# Altium PCB 宁波2号线PIS_数字功率放大器_功放板(BHC-A-2030-01)_PCB(06001536)_V1.0.PcbDoc (part 1 of 3)
Units mm, origin at the board's own origin, x right, y up, seen from the top; angles counter-clockwise.
Board outline 162 x 100 mm, 2 copper layers (Top Layer, Bottom Layer); 141 components, 101 nets, 408 pads, 79 vias.
Unrouted connection lines stored in the file: 2.
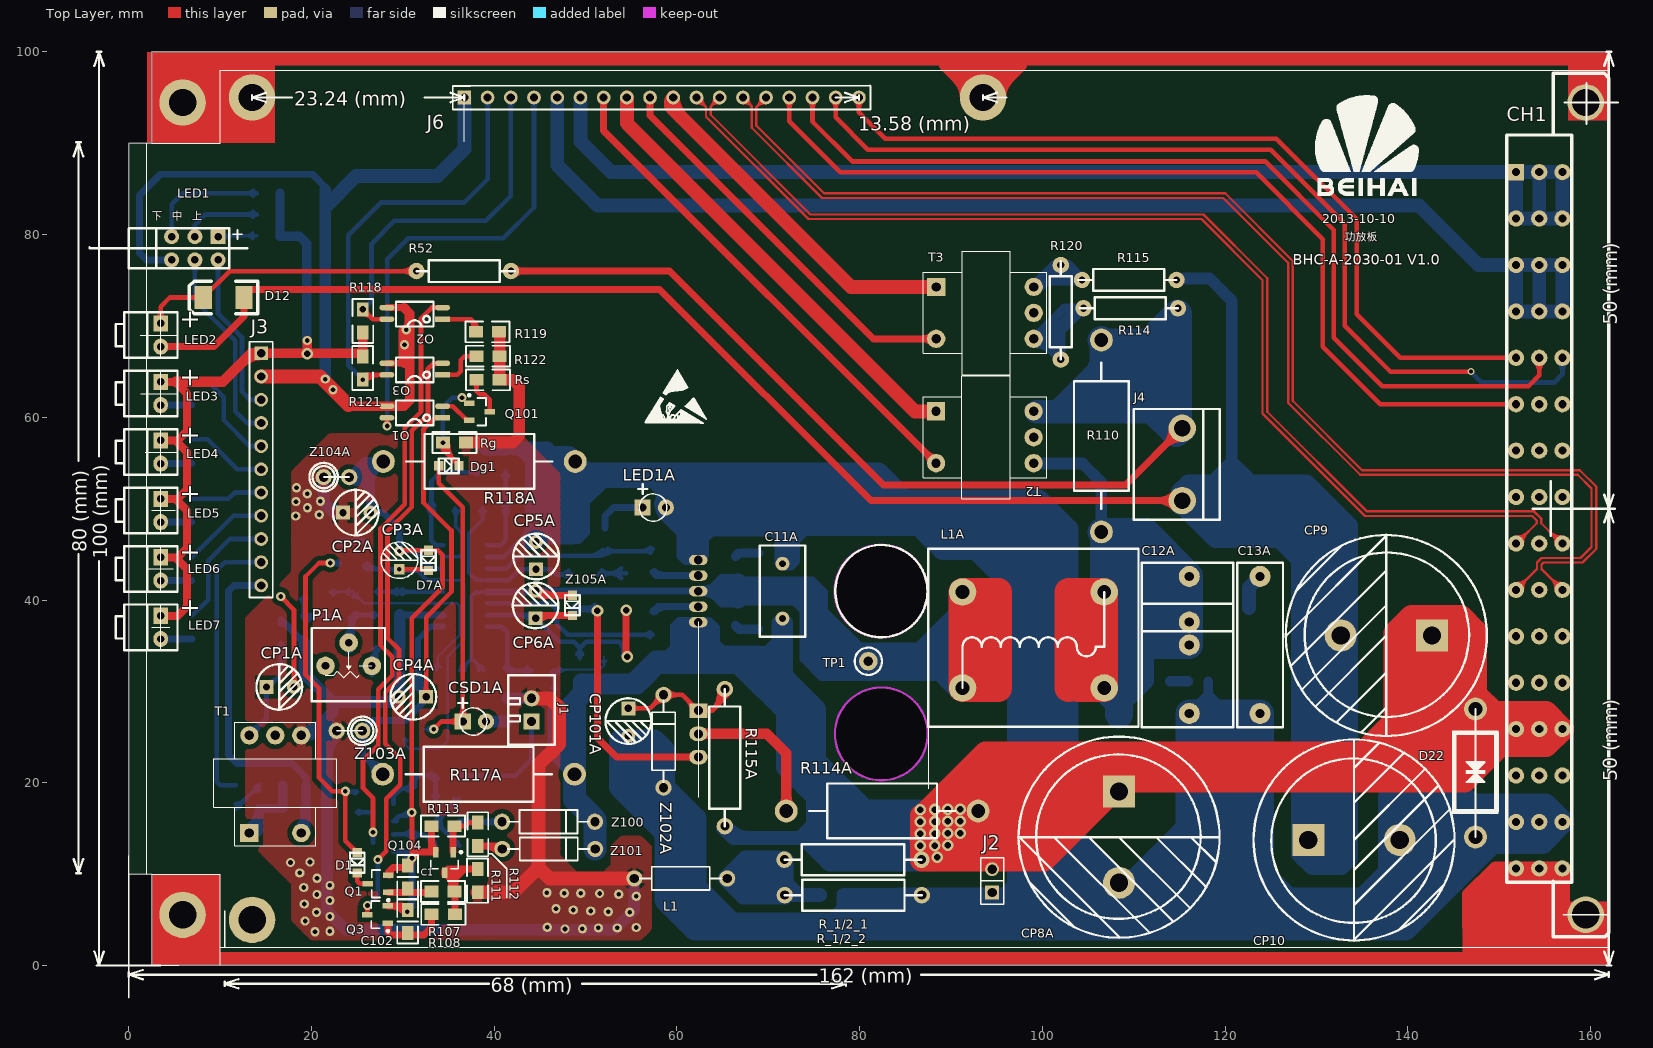
[diagram p0: Top Layer view]
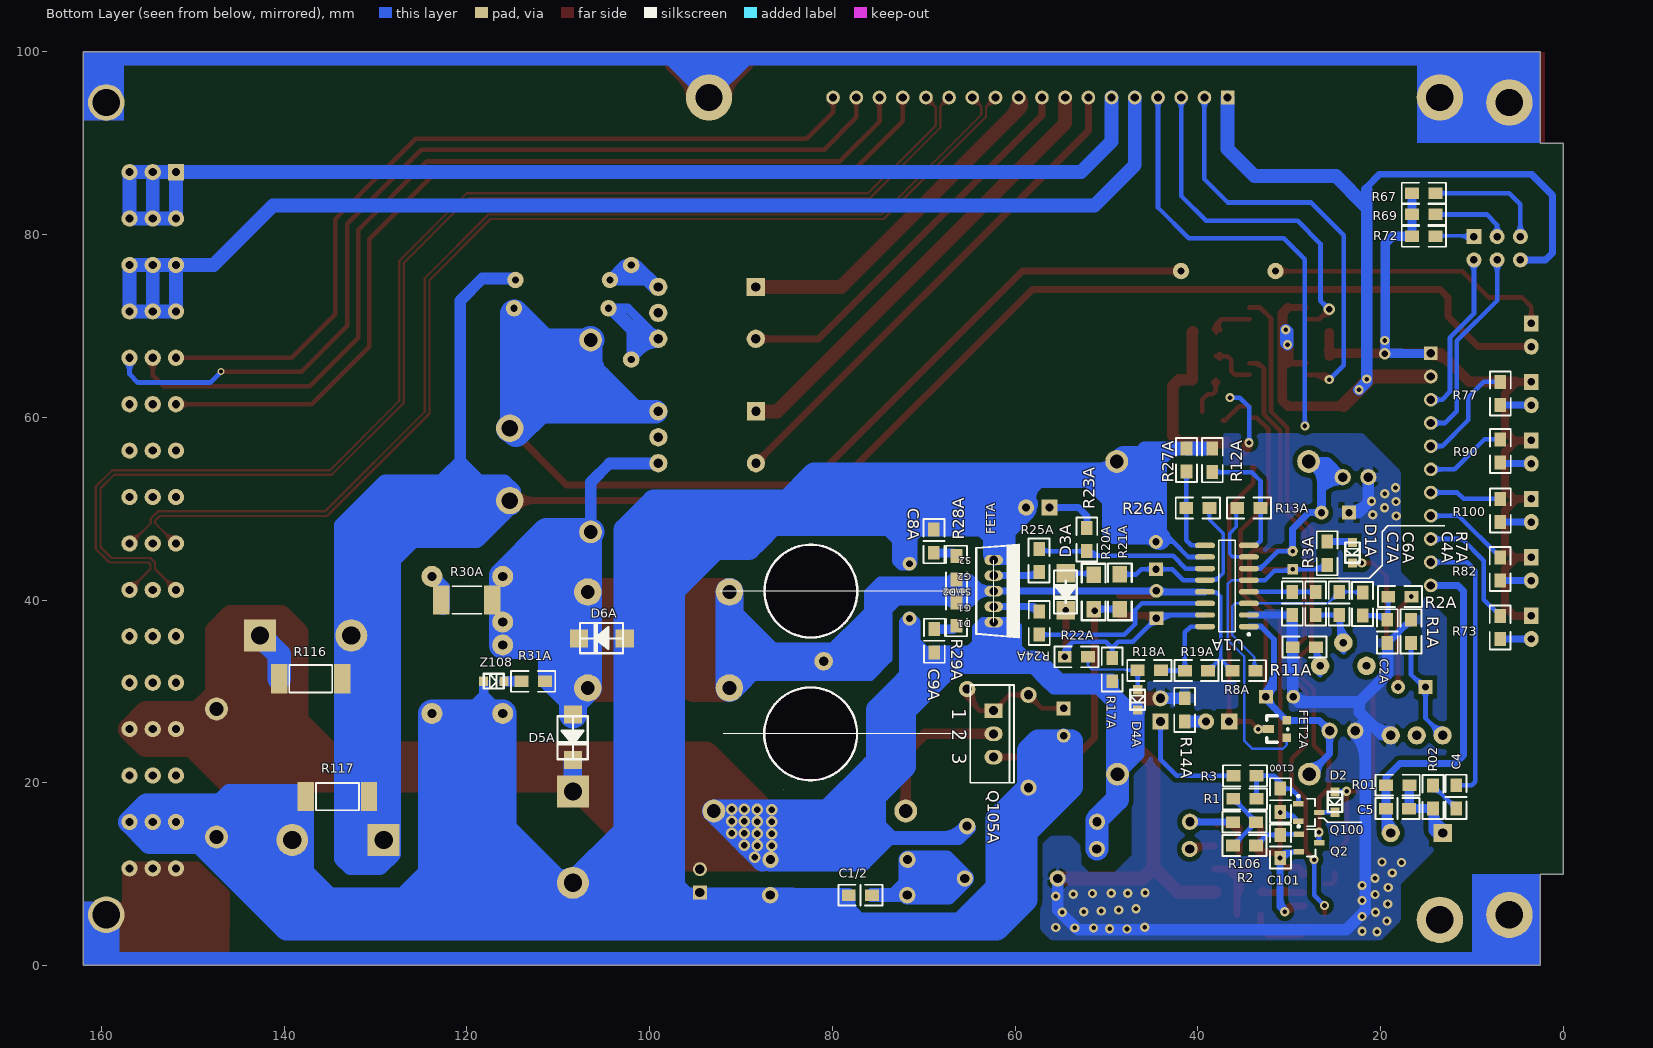
[diagram p1: Bottom Layer view, seen from below]
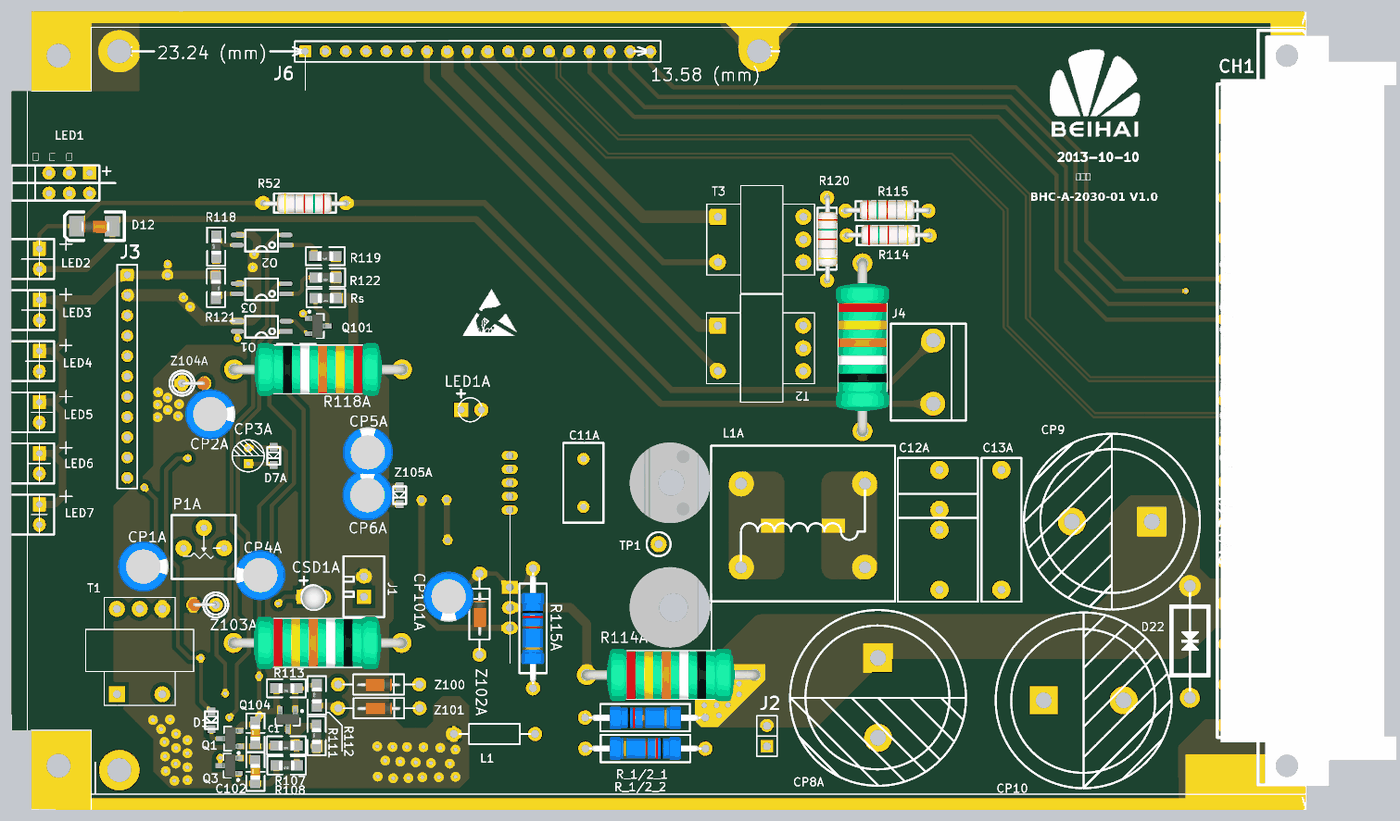
[diagram p4: 3D render of the assembled board from above, using the file's embedded part models]

## Layer stack, top to bottom
Top Layer: signal copper 0.0356
Dielectric: dielectric 0.32, FR-4, Dk 4.8
Bottom Layer: signal copper 0.0356

## Board outline
0,10 0,90 2.5,90 2.5,100 162,100 162,0 2.5,0 2.5,10
cut-out: 77.334,40.977 ccw(c82.381,40.977) 82.381,35.93 ccw(c82.381,40.977) 87.428,40.977 ccw(c82.381,40.977) 82.381,46.024 ccw(c82.381,40.977)
cut-out: 77.323,25.38 ccw(c82.37,25.38) 82.37,20.333 ccw(c82.37,25.38) 87.417,25.38 ccw(c82.37,25.38) 82.37,30.427 ccw(c82.37,25.38)

## Design rules (kind name [scope] priority, off if disabled: settings)
Clearance [All] p1: gap=0.254
ComponentClearance [All] p1: gap=0 collisioncheckmode=3 verticalgap=0 showdistances=FALSE
DiffPairsRouting [All] p1: maxlimit=0.254 minlimit=0.254 mostfreqgap=0.254 maxuncoupledlength=12.7
Height [All] p1: minheight=0 maxheight=31 prefheight=12.7
HoleSize [All] p1: absolutevalues=TRUE maxlimit=12.7 minlimit=0.025 maxpercent=80.000 minpercent=20.000
MinimumSolderMaskSliver [All] p1: minsoldermaskwidth=0
PlaneConnect [All] p1: planeconnectstyle=Relief reliefexpansion=0.508 reliefentries=4 reliefconductorwidth=1.016 reliefairgap=0.508
PolygonConnect [All] p1: connectstyle=Relief reliefconductorwidth=1.016 reliefentries=4 polygonreliefangle="90 Angle" airgapwidth=0.381
RoutingVias [All] p1: holewidth=0.711 width=1.27 viastyle="Through Hole" minholewidth=0.381 minwidth=0.762 maxholewidth=0.711 maxwidth=1.27
SilkToSilkClearance [All] p1: silktosilkclearance=0
SilkToSolderMaskClearance [IsPad] p1: minsilkscreentomaskgap=0 clearancetoexposedcopper=TRUE
SolderMaskExpansion [All] p1: expansion=0.102
Width [All] p1: maxlimit=5.08 minlimit=0.203 preferedwidth=0.254 minimp=50.000000 maximp=50.000000 favimp=50.000000
20 further rules are at their usual default settings.

## Classes and differential pairs
net class NET[0..3]: NET0 NET1 NET2 NET3
component class "U_Digital Amplifier": C1 C1/2 C2A C4 C4A C5 C6A C7A C8A C9A C11A C12A C13A C100 C101 C102 CP1A CP2A CP3A CP4A CP5A CP6A CP8A CP9 CP10 CP101A CSD1A D1 D1A D2 D3A D4A D5A D6A D7A Dg1 FET2A FETA J1 L1 L1A LED1A O1 P1A Q1 Q2 Q3 Q100 Q101 Q104 Q105A R1 R01 R1A R02 R2 R2A R3 R3A R7A R8A R11A R12A R13A R14A R17A R18A R19A R20A R21A R22A R23A R24A R25A R26A R27A R28A R29A R30A R31A R106 R107 R108 R111 R112 R113 R114A R115A R116 R117 R117A R118A R_1/2_1 R_1/2_2 Rg Rs T1 TP1 U1A Z100 Z101 Z102A Z103A Z104A Z105A Z108
component class 宁波2号线PIS-数字功率放大器（BHB-2430-01）-原理图-V0.1: CH1 D12 D22 J2 J3 J4 J6 LED1 LED2 LED3 LED4 LED5 LED6 LED7 O2 O3 R52 R67 R69 R72 R73 R77 R82 R90 R100 R110 R114 R115 R118 R119 R120 R121 R122 T2 T3
differential pair MB_TX: +MB_TX_P -MB_TX_N
differential pair MB_RX: +MB_RX_P -MB_RX_N

## Components (designator, comment, footprint, x,y, rotation, side; value= is the part's Value field where it differs from the comment)
C1 "" c0805 30.531,9.677 r270 top
C1/2 "Cap" C0805 76.922,7.696 r180 bottom
C2A "" c0805 19.264,36.583 r90 bottom
C4 "Cap" c0805 11.731,18.447 r270 bottom
C4A "" c0805 24.529,39.611 r270 bottom
C5 "Cap" c0805 18.132,17.177 r180 bottom
C6A "" c0805 27.104,39.636 r90 bottom
C7A "" c0805 29.654,39.636 r90 bottom
C8A "" c0805 68.885,46.431 r270 bottom
C9A "" c0805 68.834,35.535 r270 bottom
C11A "" MKP-0.1-160V 71.552,40.97 r270 top
C12A "" MKP-7.5-10-15-400V 116.078,27.584 r90 top
C13A "" MKP-15-100V 123.825,27.584 r90 top
C100 "" c0805 30.959,18.092 r90 bottom
C101 "" c0805 30.963,13.03 r90 bottom
C102 "" c0805 30.531,4.801 r270 top
CH1 "OPIN-48" OPIN-48F 162,50 r0 top locked
CP1A "" C5*10 15.084,30.487 r0 top
CP2A "" C5*10 23.455,49.562 r0 top
CP3A "" E10 29.627,44.355 r90 top
CP4A "" C5*10 32.554,29.411 r180 top
CP5A "" C5*10 44.588,43.364 r90 top
CP6A "" C5*10 44.537,38.005 r90 top
CP8A "" CD-22*30 108.393,14.046 r270 top
CP9 "" CD-22*30 137.643,36.119 r180 top
CP10 "" CD-22*30 134.112,13.741 r0 top
CP101A "" C5*10 54.682,28.15 r270 top
CSD1A "RED" LED-3 37.842,26.702 r0 top
D1 "" SOD-323 25.015,12.351 r270 top
D1A "" SOD-323 23.079,46.286 r270 bottom
D2 "" SOD-323 24.99,19.006 r270 bottom
D3A "DIODE" MURA120T3G#1 54.443,42.933 r270 bottom
D4A "DIODE" SOD-323 46.579,30.186 r270 bottom
D5A "DIODE" MURA120T3G#2 108.382,27.483 r270 bottom
D6A "DIODE" MURA120T3G#2 102.718,35.789 r0 bottom
D7A "DIODE" SOD-323 32.813,45.447 r270 top
D12 "DIODE" 7227AK 10.4,73.1 r180 top
D22 "D_TVS" TVS-CA 147.396,28.067 r270 top
Dg1 "" SOD-323 33.931,54.693 r0 top
FET2A "BS250F" STO23 30.375,24.823 r90 bottom
FETA "IRFI4020" MOS_diy 62.328,40.977 r270 bottom locked
J1 "Jump" CH2.54-2 44.091,26.702 r90 top
J2 "CON2" SIP2.54-2 94.5,8 r90 top
J3 "CON11" SIP2.54-11 14.5,67 r90 top
J4 "CON2" CH3.96-3P+ 115.3,58.8 r270 top
J6 "CON18" SIP2.54-18 36.74,95 r0 top locked
L1 "磁珠" L-AXIAL0.4 55.343,9.532 r0 top
L1A "Inductor Iron" 7G23A 91.262,30.378 r90 top
LED1 "LED" LED-3-3-L 3,78.5 r0 top
LED1A "Blue" LED-3 57.516,50.121 r0 top
LED2 "RED" LED-3-L 3.5,69 r90 top
LED3 "" LED-3-L 3.5,62.6 r90 top
LED4 "" LED-3-L 3.5,56.2 r90 top
LED5 "" LED-3-L 3.5,49.8 r90 top
LED6 "" LED-3-L 3.5,43.4 r90 top
LED7 "" LED-3-L 3.5,37 r90 top
O1 "TLP281" SOP4 34.352,59.944 r180 top
O2 "TLP281" SOP4 34.352,70.739 r180 top
O3 "TLP281" SOP4 34.352,64.643 r180 top
P1A "Pot" 3362/3323 21.504,31.761 r0 top locked
Q1 "MMBT5551" SOT-23B_N 27.301,8.948 r180 top
Q2 "MMBT5551" SOT-23B_N 27.835,13.418 r180 bottom
Q3 "MMBT5551" SOT-23B_N 27.25,5.569 r180 top
Q100 "MMBT5551" SOT-23B_N 27.86,16.745 r180 bottom
Q101 "MMBT5401" SOT-23B_N 38.39,60.605 r0 top
Q104 "MMBT5551" SOT-23B_N 34.566,11.284 r270 top
Q105A "TIP31F" TO-220-AB-W 62.352,25.349 r270 bottom locked
R1 "" M0805 34.845,18.219 r0 bottom
R01 "" M0805 18.132,19.743 r180 bottom
R1A "" M0805 16.659,36.583 r270 bottom
R2 "" M0805 34.896,13.139 r180 bottom
R02 "" M0805 14.271,18.422 r90 bottom
R2A "" M0805 17.878,40.367 r0 bottom
R3 "" M0805 34.82,20.759 r0 bottom
R3A "" M0805 25.854,45.111 r90 bottom
R7A "" M0805 21.979,39.561 r90 bottom
R8A "" M0805 34.929,32.261 r0 bottom
R11A "" M0805 28.329,34.836 r0 bottom
R12A "" M0805 38.404,55.311 r270 bottom
R13A "" M0805 34.404,50.061 r0 bottom
R14A "" M0805 41.449,27.972 r90 bottom
R17A "" M0805 49.363,32.392 r270 bottom
R18A "" M0805 45.304,32.286 r0 bottom
R19A "" M0805 40.154,32.286 r180 bottom
R20A "" M1206 51.395,40.875 r270 bottom
R21A "" M1206 48.525,40.901 r270 bottom
R22A "" M0805 53.3,33.789 r180 bottom
R23A "" M0805 52.157,46.616 r90 bottom
R24A "res" M0805 57.364,37.472 r90 bottom
R25A "" M0805 57.364,44.33 r270 bottom
R26A "Res3" M0805 40.004,50.086 r180 bottom
R27A "" M0805 41.229,55.336 r270 bottom
R28A "" M0805 66.404,43.542 r270 bottom
R29A "" M0805 66.404,38.462 r270 bottom
R30A "" M2512R 120,40 r180 bottom
R31A "" M0805 112.751,31.115 r180 bottom
R52 "" R-1/4W 31.5,76 r0 top
R67 "" M0805 15.262,84.515 r0 bottom
R69 "" M0805 15.26,82.191 r0 bottom
R72 "" M0805 15.262,79.791 r0 bottom
R73 "11k" M0805 6.9,37 r270 bottom
R77 "11k" M0805 6.9,62.6 r90 bottom
R82 "11k" M0805 6.9,43.4 r270 bottom
R90 "11k" M0805 6.9,56.3 r90 bottom
R100 "11k" M0805 6.9,49.8 r90 bottom
R106 "" M0805 34.896,15.704 r180 bottom
R107 "" M0805 34.413,8.084 r180 top
R108 "" M0805 34.439,5.595 r180 top
R110 "" R-2W 106.451,68.453 r270 top
R111 "" M0805 38.172,9.278 r90 top
R112 "" M0805 38.198,14.358 r90 top
R113 "" M0805 34.413,15.247 r180 top
R114 "" R-1/4W 114.833,71.933 r180 top
R114A "" R-2W 71.969,16.917 r0 top
R115 "" R-1/4W 114.681,75.032 r180 top
R115A "" R-1W 65.248,30.251 r270 top
R116 "" 1T-2512 137.084,31.394 r0 bottom
R117 "" 1T-2512 134.163,18.491 r180 bottom
R117A "" R-2W 27.798,20.936 r0 top
R118 "" M0805 25.614,70.536 r90 top
R118A "" R-2W 48.87,55.169 r180 top
R119 "" M0805 39.279,69.342 r180 top
R120 "" R-1/4W 102.017,66.32 r90 top
R121 "" M0805 25.614,65.405 r270 top
R122 "" M0805 39.33,66.675 r180 top
R_1/2_1 "" R-1W 71.766,11.583 r0 top
R_1/2_2 "" R-1W 86.803,7.696 r180 top
Rg "Res3" M0805 35.658,57.233 r180 top
Rs "Res3" M0805 39.33,64.084 r180 top
T1 "EE13" EE13-C 13.204,14.51 r90 top
T2 "EE13" EE13-c 88.367,60.655 r0 top
T3 "EE13" EE13-C 88.377,74.27 r0 top
TP1 "TP" TP 80.95,33.299 r90 top
U1A "" SOIC16_N 36.813,41.536 r0 bottom locked
Z100 "75V 1N4761" AXIAL0.4AK 40.865,15.729 r0 top
Z101 "36V 1N4753" AXIAL0.4AK 40.89,12.758 r0 top
Z102A "12V" AXIAL0.4AK 58.543,19.463 r90 top
Z103A "5.6V" AXIAL0.4AK-V 22.769,25.686 r0 top
Z104A "5.6V" AXIAL0.4AK-V 24.141,53.448 r180 top
Z105A "12V" SOD-323 48.561,40.52 r270 top
Z108 "12V" SOD-323 118.161,31.115 r180 bottom

## Footprints (in the part's own frame and the unit in brackets; to place one, negate y for a bottom-side part, rotate by r counter-clockwise, add the part's x,y. Pads: shape width x height; smd on the part's side, far side on the other; paste and mask are expansions set on the pad)
1T-2512 [mm] "Chip Resistor; Body 6.4 x 3.2 mm (LxW typ)"
  rect 1.8x3.2 smd: 1(-3.45,0) 2(3.45,0)
  silkscreen extent -2.35,-1.5 2.35,1.5, body extent -3.66,-1.5 3.66,1.5, height 1
7G23A [mm] "数字功放电感 22uH/15uH/10uH"
  round 3 hole 1.5: 1(0,0) 1(10.5,0) 2(0,-15.5) 2(10.5,-15.5)
  silkscreen extent -4.25,-19.25 15.25,3.75, body extent -4.25,-19.25 15.25,3.75, height 23
3362/3323 [mil]
  round 80 hole 33: 1(1.23,40.6) 2(101.23,140.6) 3(201.23,40.6)
  silkscreen extent -57,-111 257,204, body extent -57,-111 257,204, height 203
7227AK [mm]
  rect 1.905x2.54 smd: A(-2.216,-0.013) K(2.229,-0.013)
  silkscreen extent -3.74,-1.79 3.75,1.77, body extent -1.85,-0.7 1.65,0.8, height 1.45
AXIAL0.4AK [mil] "直插稳压管"
  round 70 hole 40: 1(0,0) 2(400,0)
  silkscreen extent 25,-50 375,50, body extent 92,-34 308,31, height 111
AXIAL0.4AK-V [mil]
  round 70 hole 40: 1(0,0) 2(110.24,0)
  silkscreen extent 0,-61 172,61, body extent -27,-31 114,33, height 217
C5*10 [mil]
  rect 60x60 hole 31.5: 1(0,0)
  round 60 hole 31.5: 2(118.11,0)
  silkscreen extent -43,-98 154,98, body extent -68,-124 180,124, height 433
c0805 [mil]
  rect 60x50 smd: 1(-50.36,-0.05) 2(49.64,-0.05)
  silkscreen extent -95,-45 95,45, body extent -39,-25 39,25, height 31
C0805 [mil]
  rect 60x50 smd: 1(-50.36,-0.05) 2(49.64,-0.05)
  silkscreen extent -95,-45 95,45, body extent -39,-25 39,25, height 31
CD-22*30 [mm] "160V 470uF 3000h"
  rect 3.5x3.5 hole 2: 1(-5,0)
  round 3.5 hole 2: 2(5,0)
  silkscreen extent -11,-11.02 11,11, body extent -11.01,-11.02 11.01,11.01, height 30.1
CH2.54-2 [mil]
  rect 70x70 hole 40: 1(0,0)
  round 70 hole 40: 2(100,0)
  silkscreen extent -100,-100 200,100, body extent -100,-100 200,100, height 276
CH3.96-3P+ [mm]
  round 3 hole 1.8: 1(0,0) 2(7.92,0)
  silkscreen extent -2.1,-5.3 10.02,4.1, body extent -2.1,-5.3 10.02,4.1, height 14.6
E10 [mil]
  rect 45x45 hole 20: 1(-39.37,0)
  round 45 hole 20: 2(39.37,0)
  silkscreen extent -79,-79 79,79, body extent -102,-99 96,100, height 446
EE13-C [mm]
  rect 2x2 hole 1.016: 1(0,0)
  round 2 hole 1.016: 2(0,-5.68) 3(10.68,0) 4(10.68,-2.84) 5(10.68,-5.68)
  silkscreen extent -1.41,-9.59 12.09,3.91, body extent -1.41,-9.59 12.09,3.91, height 9.35
EE13-c [mm]
  rect 2x2 hole 1.016: 1(0,0)
  round 2 hole 1.016: 2(0,-5.68) 3(10.68,0) 4(10.68,-2.84) 5(10.68,-5.68)
  silkscreen extent -1.41,-9.59 12.09,3.91, body extent -1.41,-9.59 12.09,3.91, height 9.35
L-AXIAL0.4 [mil] "磁珠"
  round 70 hole 40: 1(0,0) 2(400,0)
  silkscreen extent 25,-50 375,50, body extent 82,-79 318,78, height 157
LED-3 [mil]
  rect 70x70 hole 35: 1(-50,0)
  round 70 hole 35: 2(50,0)
  silkscreen extent -70,-59 54,100, body extent -66,-70 64,59, height 217
LED-3-3-L [mil]
  rect 65x65 hole 32: 1(266.89,50)
  round 65 hole 32: 2(266.89,-50) 3(166.89,50) 4(166.89,-50) 5(66.89,50) 6(66.89,-50)
  silkscreen extent -118,-87 371,87
LED-3-L [mil] "带座"
  rect 70x62 hole 32: 1(50,0)
  oval 70x62 hole 32: 2(-50,0)
  silkscreen extent -98,-73 98,193, body extent -103,-78 103,193, height 276
M0805 [mil]
  rect 60x50 smd: 1(-49.68,-0.37) 2(50.32,-0.37)
  silkscreen extent -95,-45 95,45, body extent -39,-25 39,25, height 31
M1206 [mm]
  rect 1.8x1.6 smd: 1(-1.9,0) 2(1.9,0)
  silkscreen extent -3.1,-1.3 3.1,1.3
M2512R [mm]
  rect 1.8x3.2 smd: 1(-2.8,0) 2(2.8,0)
  silkscreen extent -1.6,-1.5 1.6,1.5, body extent -2.79,-1.5 2.79,1.5, height 1.5
MKP-0.1-160V [mil] "100nF 160V"
  round 60 hole 30: 1(-118.11,0) 2(118.11,0)
  silkscreen extent -197,-98 197,98, body extent -195,-94 195,98, height 394
MKP-7.5-10-15-400V [mm] "MKP-B32652"
  round 2.3 hole 1: 1(0,0) 2(7.5,0) 2(10,0) 2(15,0)
  silkscreen extent -1.5,-4.83 16.5,5.2, body extent -1.37,-4.67 16.38,5.08, height 17
MKP-15-100V [mm] "MKP-B32652"
  round 2.3 hole 1: 1(0,0) 2(15,0)
  silkscreen extent -1.5,-2.5 16.5,2.5, body extent -1.5,-2.5 16.5,2.5, height 10
MOS_diy [mil]
  oval 45x80 hole 37.4: 1(-133.86,0) 2(-66.93,0) 3(0,0) 4(66.93,0) 5(133.86,0)
  Keep-Out Layer circle w10: c0,-788.19 r200
  silkscreen extent -200,-988 200,109, body extent -199,-929 199,8, height 156
MURA120T3G#1 [mm]
  rect 2x2 smd: 1(0,0) 2(4.064,0)
  silkscreen extent -0.3,-1.31 4.4,1.2
MURA120T3G#2 [mm]
  rect 2x2 smd: 1(0,0) 2(5,0)
  silkscreen extent 0.2,-1.7 4.9,1.6, body extent -0.04,-1.28 5.16,1.32, height 2.4
OPIN-48F [mil]
  round 157.48 hole 118.11: 0(-100,-1750) 8(-100,1750)
  round 70 hole 35: B2(-300,1450) B4(-300,1250) B6(-300,1050) B8(-300,850) B10(-300,650) B12(-300,450) B14(-300,250) B16(-300,50) B18(-300,-150) B20(-300,-350) B22(-300,-550) B24(-300,-750) B26(-300,-950) B28(-300,-1150) B30(-300,-1350) B32(-300,-1550) D4(-400,1250) D6(-400,1050) D8(-400,850) D10(-400,650) D12(-400,450) D14(-400,250) D16(-400,50) D18(-400,-150) D20(-400,-350) D22(-400,-550) D24(-400,-750) D26(-400,-950) D28(-400,-1150) D30(-400,-1350) D32(-400,-1550) Z2(-200,1450) Z4(-200,1250) Z6(-200,1050) Z8(-200,850) Z10(-200,650) Z12(-200,450) Z14(-200,250) Z16(-200,50) Z18(-200,-150) Z20(-200,-350) Z22(-200,-550) Z24(-200,-750) Z26(-200,-950) Z28(-200,-1150) Z30(-200,-1350) Z32(-200,-1550)
  rect 70x70 hole 35: D2(-400,1450)
  silkscreen extent -440,-1844 26,1876, body extent -444,-1851 442,1850, height 470
R-1/4W [mm]
  round 1.8 hole 0.8: 1(0,0) 2(10.338,0)
  silkscreen extent 0,-1.2 10.76,1.2, body extent -0.23,-1.33 10.53,1.19, height 2
R-1W [mm] "1W电阻"
  round 1.8 hole 1: 1(0,0) 2(15,0)
  silkscreen extent 0,-1.7 15,1.7, body extent 0.79,-1.46 14.25,1.4, height 0.5
R-2W [mm] "2W电阻"
  round 2.5 hole 1.5: 1(0,0) 2(21,0)
  silkscreen extent 2.5,-3 18.5,3, body extent -0.6,-3.3 21.6,3.3, height 8.3
SIP2.54-2 [mil]
  rect 60x60 hole 40: 1(0,0)
  round 60 hole 40: 2(100,0)
  silkscreen extent -50,-50 150,50, body extent -53,-53 153,53, height 945
SIP2.54-11 [mm]
  rect 1.5x1.5 hole 0.9: 1(0,0)
  round 1.5 hole 0.9: 2(-2.54,0) 3(-5.08,0) 4(-7.62,0) 5(-10.16,0) 6(-12.7,0) 7(-15.24,0) 8(-17.78,0) 9(-20.32,0) 10(-22.86,0) 11(-25.4,0)
  silkscreen extent -26.72,-1.27 1.27,1.27, body extent -26.72,-1.27 1.27,1.27, height 24
SIP2.54-18 [mm]
  rect 1.5x1.5 hole 0.9: 1(0,0)
  round 1.5 hole 0.9: 2(2.54,0) 3(5.08,0) 4(7.62,0) 5(10.16,0) 6(12.7,0) 7(15.24,0) 8(17.78,0) 9(20.32,0) 10(22.86,0) 11(25.4,0) 12(27.94,0) 13(30.48,0) 14(33.02,0) 15(35.56,0) 16(38.1,0) 17(40.64,0) 18(43.18,0)
  silkscreen extent -1.27,-1.3 44.45,1.3, body extent -1.27,-1.3 44.5,1.3, height 24
SOD-323 [mm]
  rect 1x1 smd: 1(0,0) 2(2.23,0)
  silkscreen extent 0,-0.84 2.2,0.8, body extent -0.13,-0.93 2.33,0.93, height 1.1
SOIC16_N [mm] "SOIC, 16-Leads, Body 9.9x3.9mm, Pitch 1.27mm, IPC Medium Density"
  oval 2.2x0.6 smd: 1(-2.4,4.445) 2(-2.4,3.175) 3(-2.4,1.905) 4(-2.4,0.635) 5(-2.4,-0.635) 6(-2.4,-1.905) 7(-2.4,-3.175) 8(-2.4,-4.445) 9(2.4,-4.445) 10(2.4,-3.175) 11(2.4,-1.905) 12(2.4,-0.635) 13(2.4,0.635) 14(2.4,1.905) 15(2.4,3.175) 16(2.4,4.445)
  silkscreen extent -2.52,-5 0.9,5.42, body extent -2,-5 2,5, height 1.91
SOP4 [mil] "TLP281"
  rect 64x24 smd: 1(0,0)
  oval 64x24 smd: 2(0,-50) 3(240,-50) 4(240,0)
  silkscreen extent 39,-75 201,31, body extent 34,-80 206,36, height 59
SOT-23B_N [mm]
  rect 1.15x0.6 smd: 1(-1.125,0.95) 2(-1.125,-0.95) 3(1.125,0)
  silkscreen extent -1.25,-1.5 0.7,1.92, body extent -1.35,-1.46 1.12,1.46, height 1
STO23 [mil] "P-MOS--BS250F"
  rect 36x50 smd: 1(41.94,76.06)
  rect 36x36 smd: 2(3.94,-3.94) 3(78.94,-3.94)
  silkscreen extent -16,-9 99,81
TO-220-AB-W [mm] "TO, Thru-Hole, Vertical, Heatsink Mounted; 3 In-Line Leads; Pitch 2.54 mm"
  rect 1.6x2 hole 1: 1(-2.54,0)
  oval 1.6x2 hole 1: 2(0,0) 3(2.54,0)
  Keep-Out Layer circle w0.254: c0,-20.02 r5.08
  silkscreen extent -5.35,-25.1 5.35,2.25, body extent -4.95,-23.52 4.95,0.28, height 4
TP [mil] "test point"
  round 80 hole 40: 1(0,0)
  silkscreen extent -59,-59 59,59
TVS-CA [mm] "1.5k150CA"
  round 2.5 hole 1.5: 1(0,0) 2(14,0)
  silkscreen extent 0,-2.5 14,2.5

## Part data
C1 C2A C4A C6A C7A C8A C9A C11A C12A C13A C100 C101 C102: library part Cap, "Capacitor"
C1/2 C4 C5: "Capacitor"
CP1A CP2A CP3A CP4A CP5A CP6A CP8A CP9 CP10 CP101A: library part "Cap Pol1", "Polarized Capacitor (Radial)"
CSD1A LED2: library part LED2, "Typical RED, GREEN, YELLOW, AMBER GaAs LED"
D1 D1A D2 Dg1: library part D
D3A D4A D5A D6A D7A D12: "Default Diode"
FET2A: library part MOSFET-P, "P-Channel MOSFET"
FETA: library part IRF4019H-117P
J2 J4 J6: "Connector"
L1: library part Res2, "inductor"
L1A: "Magnetic-Core Inductor"
LED1: library part 3-LED
LED1A: library part LED1, "Typical RED GaAs LED"
LED3 LED4 LED5 LED6 LED7: library part LED
O1 O2 O3: library part Optoisolator1, "4-Pin Phototransistor Optocoupler"
P1A: library part RPot, "Potentiometer"
Q1 Q2 Q3 Q100 Q104: library part NPN, "NPN Bipolar Transistor"
Q101: library part PNP, "PNP Bipolar Transistor"
Q105A: library part QNPN, "NPN Bipolar Transistor"
R1 R01 R1A R2 R02 R2A R3 R3A R7A R8A R11A R12A R13A R14A R17A R18A R19A R20A R21A R22A R23A R24A R25A R27A R28A R29A R30A R31A R52 R73 R77 R82 R90 R100 R106 R107 R108 R110 R111 R112 R113 R114 R114A R115 R115A R116 R117 R117A R118 R118A R119 R120 R121 R122 R_1/2_1 R_1/2_2: library part Res3, "Resistor"
R26A Rg Rs: "Resistor"
R67 R69 R72: library part RES1
U1A: library part IRS2092(S)
Z100 Z101: library part ZENER
Z102A Z103A Z104A Z105A Z108: library part "D Zener", "Zener Diode"

## Free pads (board coordinates)
  round 5.08 hole 3: 7(5.9,5.55) 8(5.9,94.45) 8(13.5,5) 8(13.5,95) 8(93.5,95)

## Via types
v1: diameter 1.016, hole 0.508, Top Layer to Bottom Layer, 57 vias
v2: diameter 1.27, hole 0.711, Top Layer to Bottom Layer, 21 vias
v3: diameter 0.762, hole 0.457, Top Layer to Bottom Layer, 1 vias

## Nets (pads, with @x,y where several pads share a name; then routed paths per layer and width w, separated by ;. In a path a pad name is that pad's centre, name@x,y a point inside that pad or via, vN(x,y) a via of type N, cw(c..) or ccw(c..) an arc to the next point about the centre after c; other vN are vias at no path point)
+0DB_CPU: J3.6 R90.2 | length 10.8
  Bottom Layer w0.508: R90.2@6.891,57.578 8.622,57.578 11.9,54.3 J3.6@14.5,54.3 ; J3.6@14.149,53.949 ccw(c13.303,53.103) 13.303,54.3 ccw(c13.303,55.497) J3.6@14.149,54.651
+3DB_CPU: J3.5 R77.2 | length 13.9
  Bottom Layer w0.508: R77.2@6.891,63.878 8.722,63.878 10.4,62.2 10.4,59.7 13.26,56.84 J3.5@14.5,56.84 ; J3.5@14.149,56.489 ccw(c13.303,55.643) 13.303,56.84 ccw(c13.303,58.037) J3.5@14.149,57.191
+24VGND: CH1.B2 CH1.B4 CH1.D2 CH1.D4 CH1.Z2 CH1.Z4 J6.6 | length 134
  Bottom Layer w1.524: J6.6@49.44,95 49.44,90.16 52.77,86.83 CH1.D2@151.84,86.83 ; CH1.D2@151.84,86.83 CH1.D4@151.84,81.75 CH1.B4@154.38,81.75 ; CH1.D2@151.84,86.83 CH1.B2@154.38,86.83 ; CH1.B4@154.38,81.75 CH1.Z4@156.92,81.75 CH1.Z2@156.92,86.83 CH1.B2@154.38,86.83 ; CH1.B4@154.38,81.75 CH1.B2@154.38,86.83
+VAA_A: CP4A.1 FET2A.3 O1.1 R117A.1 U1A.1 Z103A.2 | length 76
  Top Layer w0.508: CP4A.1@32.195,29.77 ccw(c31.328,30.637) 32.554,30.637 ccw(c33.78,30.637) CP4A.1@32.913,29.77 ; CP4A.1@32.554,29.411 32.554,38.127 35.328,40.901 35.328,47.603 32.258,50.673 32.258,58.674 33.528,59.944 O1.1@34.352,59.944
  Bottom Layer w0.635: 31.659,31.111 ccw(c34.254,31.111) CP4A.1@32.419,29.276 ; 31.659,32.644 ccw(c35.787,32.644) CP4A.1@32.868,29.725 ; CP4A.1@32.109,29.411 ccw(c31.036,29.411) 31.795,30.169 ccw(c32.554,30.928) CP4A.1@32.554,29.855 ; CP4A.1@32.554,29.411 31.659,30.305 31.659,35.668 33.082,37.091 U1A.1@34.413,37.091
  Bottom Layer w0.762: Z103A.2@25.21,25.327 cw(c24.343,24.46) 25.569,24.46 cw(c26.796,24.46) Z103A.2@25.928,25.327 ; Z103A.2@25.569,26.194 ccw(c25.569,27.42) 26.436,26.553 ccw(c27.304,25.686) Z103A.2@26.077,25.686 ; R117A.1@26.929,20.936 ccw(c24.831,20.936) 26.315,22.42 ccw(c27.798,23.903) R117A.1@27.798,21.805 ; R117A.1@27.798,20.936 25.569,23.165 Z103A.2@25.569,25.686 26.711,26.828 FET2A.3@30.275,26.828 32.554,29.107 CP4A.1@32.554,29.411 ; 31.689,28.242 ccw(c30.52,29.411) CP4A.1@32.173,29.411
-3DB_CPU: J3.7 R100.2 | length 9.8
  Bottom Layer w0.508: R100.2@6.891,51.078 10.918,51.078 11.6,51.76 J3.7@14.5,51.76 ; J3.7@14.149,51.409 ccw(c13.303,50.563) 13.303,51.76 ccw(c13.303,52.957) J3.7@14.149,52.111
-6DB_CPU: J3.8 R82.1 | length 11.4
  Bottom Layer w0.508: R82.1@6.909,44.662 11.468,49.22 J3.8@14.5,49.22 ; J3.8@14.149,48.869 ccw(c13.303,48.023) 13.303,49.22 ccw(c13.303,50.417) J3.8@14.149,49.571
-9DB_CPU: J3.9 R73.1 | length 15.4
  Bottom Layer w0.508: R73.1@6.909,38.262 8.7,40.052 8.7,44.3 11.08,46.68 J3.9@14.5,46.68 ; J3.9@14.149,46.329 ccw(c13.303,45.483) 13.303,46.68 ccw(c13.303,47.877) J3.9@14.149,47.031
-VSS_A: C1.1 C100.1 C101.1 C102.1 CP2A.2 CP3A.2 D7A.1 Q1.2 Q2.2 Q3.2 Q100.2 Q104.2 R113.2 R118A.2 U1A.6 Z104A.1 | length 129
  Top Layer w0.508: CP3A.2@29.627,45.355 29.72,45.447 D7A.1@32.813,45.447 33.854,45.447 34.337,44.965 34.337,41.358 30.984,38.005 v1(30.984,16.745) 31.008,16.745 v1(31.008,11.758) ; CP3A.2@29.852,45.131 cw(c30.617,44.366) 30.617,45.447 ; v1@30.805,16.566 cw(c30.313,16.074) 31.008,16.074 ; v1@30.805,16.925 ccw(c30.371,17.359) 30.984,17.359 ccw(c31.597,17.359) v1@31.164,16.925 ; v1@30.829,11.937 ccw(c30.395,12.371) 31.008,12.371 ccw(c31.622,12.371) v1@31.188,11.937 ; 31.008,16.191 cw(c31.539,16.191) v1@31.164,16.566 ; D7A.1@32.639,45.273 ccw(c32.219,44.854) 32.219,45.447 ccw(c32.219,46.041) D7A.1@32.639,45.621 ; D7A.1@32.987,45.273 cw(c33.407,44.854) 33.407,45.447 cw(c33.407,46.041) D7A.1@32.987,45.621
  Top Layer w0.762: Q3.2@28.375,6.519 29.89,6.519 ; Q1.2@28.426,9.898 28.426,10.225 28.911,10.709 ; Q1.2@28.621,9.889 cw(c29.624,9.996) 28.911,10.709 ; Q3.2@28.643,6.519 cw(c28.643,4.041) C102.1@30.396,5.794 ; Q3.2@28.684,6.519 cw(c28.684,4.168) C102.1@30.346,5.831 ; C102.1@29.922,6.076 ccw(c30.271,6.682) C102.1@30.453,6.006 ; v1(30.485,5.883) 30.526,5.883 29.89,6.519 ; C102.1@30.521,6.264 cw(c30.506,7.135) 29.89,6.519 ; C1.1@30.526,10.709 28.911,10.709 ; C1.1@30.772,10.899 cw(c31.646,11.12) v1(31.008,11.758) 31.66,12.409 Q104.2@33.321,12.409 ; C1.1@30.78,10.836 cw(c32.452,10.836) v1@31.27,12.019 ; 33.135,12.89 R113.2@33.135,15.256 ; 33.135,13.649 ccw(c34.58,13.649) Q104.2@33.558,12.627
  Bottom Layer w0.508: Q100.2@28.985,15.795 29.579,16.39 ; Q100.2@29.306,15.795 cw(c30.081,15.795) 29.533,16.343 ; CP3A.2@29.627,45.355 31.269,45.355 33.183,43.441 U1A.6@34.413,43.441 ; 29.835,12.267 ccw(c30.713,13.503) C101.1@30.966,12.008 ; CP3A.2@29.852,45.131 cw(c30.394,44.589) 30.394,45.355 cw(c30.394,46.122) CP3A.2@29.852,45.58 ; 30.039,12.468 cw(c30.039,11.083) C101.1@31.106,11.966 ; 30.17,16.548 cw(c30.497,16.118) C100.1@30.828,16.545 ; C101.1@30.448,12.318 cw(c30.014,11.885) C101.1@30.627,11.885 ; C101.1@30.458,12.427 cw(c30.044,11.845) C101.1@30.755,11.781 ; C101.1@30.478,12.306 cw(c30.375,11.236) C101.1@31.204,11.919 ; C100.1@30.656,16.918 cw(c29.579,17.751) 29.579,16.39 ; C101.1@30.715,11.642 ccw(c28.96,10.19) Q2.2@28.96,12.468 30.298,12.468 ; C101.1@30.754,11.758 ccw(c30.141,11.758) 30.575,12.191 ccw(c31.008,12.625) C101.1@31.008,12.012 ; C100.1@30.799,16.919 cw(c29.579,18.059) 29.579,16.39 ; C101.1@30.946,12.261 cw(c30.823,12.993) 30.298,12.468 ; C100.1@30.958,16.812 30.535,16.39 29.579,16.39 ; v1(31.008,11.758) 30.298,12.468 ; 32.801,43.823 ccw(c33.613,44.635) U1A.6@33.613,43.487
  Bottom Layer w0.762: CP2A.2@26.455,49.562 27.824,49.562 29.627,47.759 CP3A.2@29.627,45.355 ; CP2A.2@26.724,49.293 cw(c27.375,48.642) 27.375,49.562 cw(c27.375,50.482) CP2A.2@26.724,49.831 ; v1@30.396,5.973 ccw(c28.916,7.453) 31.008,7.453 ; v1(30.485,5.883) 31.008,6.406 v1(31.008,11.758)
  Bottom Layer w0.889: CP2A.2@26.455,49.562 CP2A.2@26.455,50.045
  Bottom Layer w1.016: Z104A.1@24.161,53.068 cw(c24.318,50.049) 26.455,52.187 ; CP2A.2@26.455,50.045 26.455,52.186 ; 26.455,52.738 cw(c29.161,52.738) R118A.2@27.247,54.651 ; R118A.2@27.87,55.169 26.594,55.169 ; Z104A.1@24.41,53.179 cw(c25.061,52.528) 25.061,53.448 ; Z104A.1@24.41,53.179 cw(c25.061,52.528) 25.061,53.448 ; Z104A.1@24.41,53.179 cw(c25.061,52.528) 25.061,53.448 ; Z104A.1@24.41,53.718 ccw(c25.061,54.368) 25.061,53.448 ; Z104A.1@24.41,53.718 ccw(c25.061,54.368) 25.061,53.448 ; Z104A.1@24.41,53.718 ccw(c25.061,54.368) 25.061,53.448 ; 25.193,53.448 25.899,53.448 26.455,54.004 26.455,52.186 ; 25.193,53.448 Z104A.1@24.141,53.448 25.861,55.169 26.594,55.169 ; 25.193,53.448 26.455,52.186 ; 25.193,53.448 25.193,53.768 26.594,55.169
ADDR1: CH1.D10 J6.18 | length 92.6
  Top Layer w0.508: J6.18@79.569,94.649 cw(c78.723,93.803) 79.92,93.803 cw(c81.117,93.803) J6.18@80.271,94.649 ; J6.18@79.92,95 79.92,93.38 82.8,90.5 125.6,90.5 134.4,81.7 134.4,71.3 139.19,66.51 CH1.D10@151.84,66.51
ADDR2: CH1.B10 J6.16 | length 107.8
  Top Layer w0.508: J6.16@74.489,94.649 cw(c73.643,93.803) 74.84,93.803 cw(c76.037,93.803) J6.16@75.191,94.649 ; J6.16@74.84,95 74.84,92.36 79.2,88 124.4,88 131.9,80.5 131.9,68.7 137.2,63.4 153.2,63.4 154.38,64.58 CH1.B10@154.38,66.51 ; CH1.B10@153.931,66.061 cw(c152.847,64.977) 154.38,64.977 cw(c155.913,64.977) CH1.B10@154.829,66.061
ADDR3: CH1.Z10 J6.17 | length 106.8
  Top Layer w0.508: J6.17@77.029,94.649 cw(c76.183,93.803) 77.38,93.803 cw(c78.577,93.803) J6.17@77.731,94.649 ; J6.17@77.38,95 77.38,92.82 80.9,89.3 125,89.3 133.1,81.2 133.1,70 138.1,65 v3(146.9,65)
  Bottom Layer w0.508: v3(146.9,65) 148.1,63.8 156,63.8 156.92,64.72 CH1.Z10@156.92,66.51 ; CH1.Z10@156.471,66.061 cw(c155.387,64.977) 156.92,64.977 cw(c158.453,64.977) CH1.Z10@157.369,66.061
ADDR4: CH1.D12 J6.15 | length 106.2
  Top Layer w0.508: J6.15@71.949,94.649 cw(c71.103,93.803) 72.3,93.803 cw(c73.497,93.803) J6.15@72.651,94.649 ; J6.15@72.3,95 72.3,92.4 77.9,86.8 123.4,86.8 130.7,79.5 130.7,67.7 136.97,61.43 CH1.D12@151.84,61.43 ; CH1.D12@151.391,60.981 ccw(c150.307,59.897) 150.307,61.43 ccw(c150.307,62.963) CH1.D12@151.391,61.879
AGND1: C5.1 J3.11 R01.1 T1.2 | length 41.5
  Bottom Layer w0.762: 11.514,41.607 11.507,41.6 ; J3.11@14.239,41.339 ccw(c13.609,40.709) 13.609,41.6 ccw(c13.609,42.491) J3.11@14.239,41.861 ; J3.11@14.5,41.6 11.507,41.6 ; R01.1@19.394,19.733 19.394,20.556 17.851,22.098 11.832,22.098 10.917,23.012 10.917,41.01 11.507,41.6
  Bottom Layer w1.016: T1.2@18.536,14.858 ccw(c16.425,16.97) C5.1@19.411,16.97 ; C5.1@19.174,17.113 cw(c18.388,16.659) 19.265,16.424 ; R01.1@19.394,19.733 19.411,19.716 C5.1@19.411,17.176 T1.2@19.411,14.872
"ANALOG GND": C2A.1 C7A.1 CP2A.1 CP4A.2 J1.2 L1.1 R1A.1 R11A.2 R14A.2 R111.1 R119.1 R122.1 Rg.1 Rs.1 T1.5 U1A.2 Z103A.1 Z104A.2 | length 176.2
  Top Layer w1.27: Rg.1@36.92,57.242 42.025,57.242 42.032,57.236 42.759,57.963 42.759,63.399 42.064,64.094 Rs.1@40.592,64.094 R122.1@40.592,66.685 40.592,69.301 R119.1@40.541,69.352
  Top Layer w1.524: R111.1@38.182,8.016 42.118,8.016 44.853,10.751 ; J1.2@44.091,29.242 46.072,29.242 47.088,28.226 47.088,24.213 44.853,21.978 44.853,10.751 ; L1.1@55.343,9.532 46.072,9.532 44.853,10.751
  Bottom Layer w0.635: R11A.2@29.607,34.845 R11A.2@29.657,34.895
  Bottom Layer w0.762: R1A.1@16.668,37.464 cw(c16.668,36.544) 17.318,37.194 ; R1A.1@16.668,37.845 C2A.1@19.209,35.303 ; 18.521,35.992 ccw(c19.263,36.734) C2A.1@19.263,35.684 ; C7A.1@29.653,38.356 29.657,38.361 U1A.2@34.413,38.361
  Bottom Layer w1.27: T1.5@18.886,25.555 ccw(c18.897,28.604) 21.053,26.448 ; C2A.1@19.209,35.303 19.209,31.949 22.323,28.836 ; T1.5@19.722,25.241 19.846,25.241 21.053,26.448 ; 21.053,26.347 21.053,26.448 ; Z104A.2@21.341,53.448 21.341,50.671 22.45,49.562 CP2A.1@23.455,49.562 ; 21.522,50.49 ccw(c23.455,52.422) CP2A.1@23.455,49.689 ; 21.688,22.462 cw(c25.993,22.462) Z103A.1@22.949,25.506 ; 21.688,25.528 cw(c22.927,25.528) 22.051,26.404 ; 21.688,25.686 21.688,5.976 23.771,3.893 53.158,3.893 55.343,6.077 L1.1@55.343,9.532 ; 27.86,28.836 ccw(c27.86,31.105) CP4A.2@29.464,29.5 ; R11A.2@29.607,34.845 29.607,29.464 CP4A.2@29.554,29.411 28.979,28.836 22.323,28.836 ; R11A.2@29.657,34.895 C7A.1@29.657,38.361 ; R14A.2@41.44,29.25 44.082,29.25 J1.2@44.091,29.242 ; 21.053,26.448 22.323,27.718 22.323,28.836
  other v1: 20.396,3.683 22.022,3.759 47.752,3.988 49.657,4.013 51.41,4.115 53.467,4.115 55.55,4.166 45.822,4.191 19.304,4.877 22.022,5.359 20.549,5.817 54.839,5.817 52.476,5.893 50.571,5.969 48.641,6.071 46.769,6.198 19.228,6.731 22.022,7.112 55.55,7.569 20.599,7.772 53.645,7.798 51.537,7.874 47.676,7.899 49.479,7.899 45.771,7.976 19.152,8.534 22.022,8.763 20.601,9.551 18.72,10.135 17.711,11.278 19.837,11.328 18.288,49.2 20.853,49.327 19.558,50.089 18.313,50.775 20.98,50.825 19.54,51.638 18.364,52.299
AUDIO_OUT: C4.1 J3.10 | length 33.5
  Bottom Layer w0.508: 11.514,44.147 10.538,44.147 10.531,44.14 ; C4.1@11.732,19.726 10.012,19.726 9.622,20.117 9.622,43.231 10.531,44.14 ; J3.10@14.149,43.789 ccw(c13.303,42.943) 13.303,44.14 ccw(c13.303,45.337) J3.10@14.149,44.491 ; J3.10@14.5,44.14 10.531,44.14
CSD_A: CSD1A.1 Dg1.1 FET2A.1 | length 43.1
  Top Layer w0.508: v1(33.372,25.864) 34.21,26.702 CSD1A.1@36.572,26.702 36.572,50.146 33.931,52.788 Dg1.1@33.931,54.693 ; v1@33.372,26.118 ccw(c33.372,26.731) 33.805,26.298 ccw(c34.239,25.864) v1@33.626,25.864 ; Dg1.1@33.757,54.519 cw(c33.337,54.099) 33.931,54.099 cw(c34.524,54.099) Dg1.1@34.105,54.519 ; CSD1A.1@36.123,26.253 ccw(c35.039,25.169) 35.039,26.702 ccw(c35.039,28.235) 36.123,27.151 ccw(c35.039,28.235) 36.572,28.235 ccw(c38.105,28.235) CSD1A.1@37.021,27.151
  Bottom Layer w0.254: FET2A.1@32.33,25.864 v1(33.372,25.864) ; FET2A.1@32.718,25.654 cw(c33.224,25.148) v1@33.224,25.864 ; FET2A.1@32.718,26.121 ccw(c33.339,26.742) v1@33.339,25.864 ; v1@33.102,25.595 ccw(c32.452,24.944) 32.452,25.864 ccw(c32.452,26.784) v1@33.102,26.133